# EAGLE board mysch (EAGLE 9.5.0)
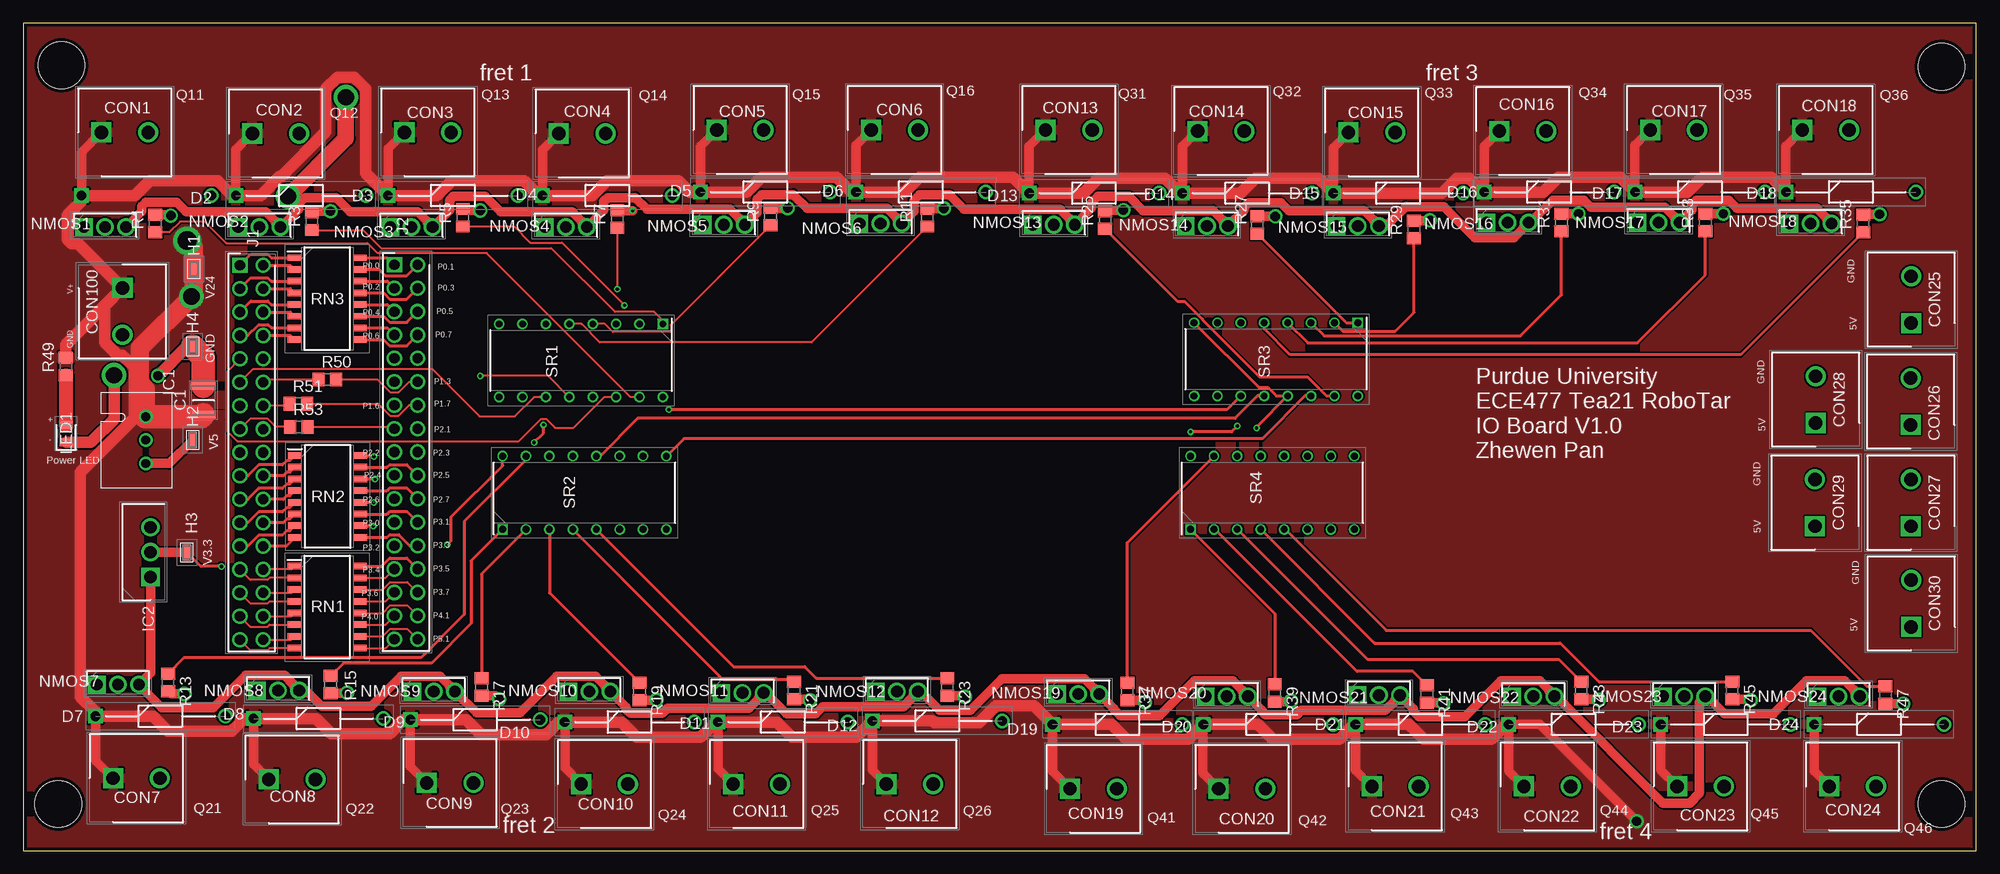
[diagram p0: board, top side]
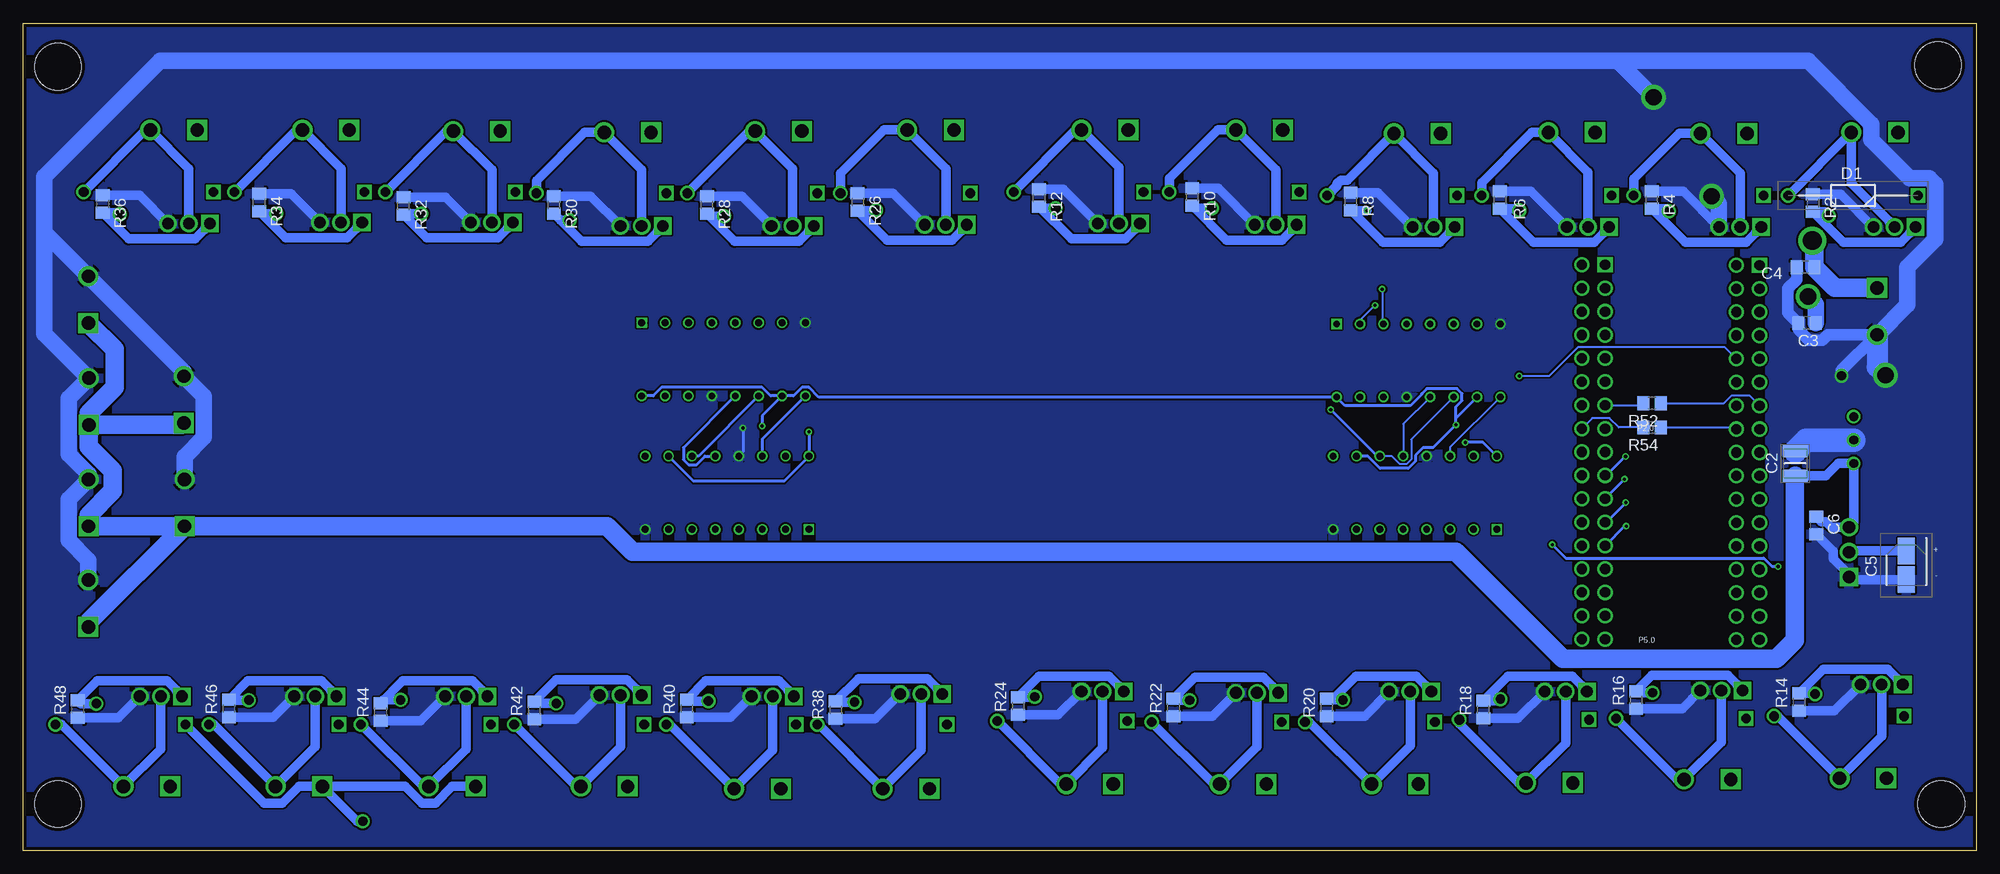
[diagram p1: board, bottom side, seen from below]

Size 212.07 x 89.84 mm. Coordinates in mm from the lower left corner, seen from the top.
Outline: 0,0 212.07,0 212.07,89.84 0,89.84 0,0
Copper layers (1*16): Top 0.0356mm / dielectric 1.5011mm / Bottom 0.0356mm
Design rules "ECE_Senior_Design": minimum track width 8mil, minimum drill 13mil, track to track 8mil, track to pad 8mil, pad to pad 6mil, via to via 8mil, smd to smd 6mil, copper to edge 15mil, drill to drill 8mil, minimum pad ring 7mil, minimum via ring 7mil, stop-mask expansion 3mil, vias tented up to drill 0mil, thermal gap 10mil
Holes 5.08 mm at 4.17,85.27 3.81,5.08 208.28,85.09 208.28,5.08

## Footprints (pad centres in the part's own frame; a part is rotated, then mirrored left to right if it is on the bottom)
CAPC3225X270N = smd 0.82 x 2.72: 1 -1.55,0; 2 1.55,0
CAPC3225X270N' = smd 1.26 x 2.72: 1 -1.33,0; 2 1.33,0
C0805 = smd 1.3 x 1.5: 1 -0.95,0; 2 0.95,0
CAPAE430X550N = smd 2.85 x 1.8: 1 -1.55,0; 2 1.55,0
SHDR2W90P0X508_1X2_1016X950X15 = drill 1.45 pad 2.175 square: 1 0,0 | drill 1.45 pad 2.175: 2 5.08,0
DIOAD1410W86L470D235 = drill 1.05 pad 1.575 square: 1 0,0 | drill 1.05 pad 1.575: 2 14.1,0
S276146R = smd 1.8 x 1: 1 0,0
OKI-78SR = drill 0.96 pad 1.46: 1 0,0; 2 2.54,0; 3 5.08,0
TO270P460X1020X2008-3P = drill 1.32 pad 1.98 square: 1 0,0 | drill 1.32 pad 1.98: 2 2.7,0; 3 5.4,0
HDRV34W90P254_2X17_4308X500X56 = drill 1.1 pad 1.65 square: 1 0,0 | drill 1.1 pad 1.65: 2 0,2.54; 3 2.54,0; 4 2.54,2.54; 5 5.08,0; 6 5.08,2.54; 7 7.62,0; 8 7.62,2.54; 9 10.16,0; 10 10.16,2.54; 11 12.7,0; 12 12.7,2.54; 13 15.24,0; 14 15.24,2.54; 15 17.78,0; 16 17.78,2.54; 17 20.32,0; 18 20.32,2.54; 19 22.86,0; 20 22.86,2.54; 21 25.4,0; 22 25.4,2.54; 23 27.94,0; 24 27.94,2.54; 25 30.48,0; 26 30.48,2.54; 27 33.02,0; 28 33.02,2.54; 29 35.56,0; 30 35.56,2.54; 31 38.1,0; 32 38.1,2.54; 33 40.64,0; 34 40.64,2.54
LEDC2012X90N = smd 0.9 x 1.4: 1 -0.95,0; 2 0.95,0
TO229P250X658X985-3P = drill 1.27 pad 1.905 square: 1 0,0 | drill 1.27 pad 1.905: 2 2.29,0; 3 4.58,0
R0805 = smd 1.3 x 1.5: 1 -0.95,0; 2 0.95,0
SOIC127P762X215-16N = smd 1.505 x 0.7: 1 -3.548,4.445; 2 -3.548,3.175; 3 -3.548,1.905; 4 -3.548,0.635; 5 -3.548,-0.635; 6 -3.548,-1.905; 7 -3.548,-3.175; 8 -3.548,-4.445; 9 3.548,-4.445; 10 3.548,-3.175; 11 3.548,-1.905; 12 3.548,-0.635; 13 3.548,0.635; 14 3.548,1.905; 15 3.548,3.175; 16 3.548,4.445
DIP794W53P254L1930H508Q16N = drill 0.73 pad 1.13 square: 1 -3.97,8.89 | drill 0.73 pad 1.13: 2 -3.97,6.35; 3 -3.97,3.81; 4 -3.97,1.27; 5 -3.97,-1.27; 6 -3.97,-3.81; 7 -3.97,-6.35; 8 -3.97,-8.89; 9 3.97,-8.89; 10 3.97,-6.35; 11 3.97,-3.81; 12 3.97,-1.27; 13 3.97,1.27; 14 3.97,3.81; 15 3.97,6.35; 16 3.97,8.89

## Placement (x,y rotation side)
C1  10u  [CAPC3225X270N]  19.58,48.89 270 top
C2  22u  [CAPC3225X270N']  19.68,42.04 270 bottom
C3  1u  [C0805]  18.41,57.28 180 bottom
C4  0.1u  [C0805]  18.57,63.32 180 bottom
C5  865080540004  [CAPAE430X550N]  7.62,30.99 270 bottom
C6  100n  [C0805]  17.4,35.31 270 bottom
CON1  1888687  [SHDR2W90P0X508_1X2_1016X950X15]  8.51,77.98 0 top
CON2  1888687  [SHDR2W90P0X508_1X2_1016X950X15]  24.89,77.85 0 top
CON3  1888687  [SHDR2W90P0X508_1X2_1016X950X15]  41.4,77.98 0 top
CON4  1888687  [SHDR2W90P0X508_1X2_1016X950X15]  58.17,77.85 0 top
CON5  1888687  [SHDR2W90P0X508_1X2_1016X950X15]  75.31,78.23 0 top
CON6  1888687  [SHDR2W90P0X508_1X2_1016X950X15]  92.08,78.23 0 top
CON7  1888687  [SHDR2W90P0X508_1X2_1016X950X15]  9.78,7.87 0 top
CON8  1888687  [SHDR2W90P0X508_1X2_1016X950X15]  26.67,7.75 0 top
CON9  1888687  [SHDR2W90P0X508_1X2_1016X950X15]  43.81,7.37 0 top
CON10  1888687  [SHDR2W90P0X508_1X2_1016X950X15]  60.58,7.24 0 top
CON11  1888687  [SHDR2W90P0X508_1X2_1016X950X15]  77.09,7.24 0 top
CON12  1888687  [SHDR2W90P0X508_1X2_1016X950X15]  93.73,7.24 0 top
CON13  1888687  [SHDR2W90P0X508_1X2_1016X950X15]  111,78.23 0 top
CON14  1888687  [SHDR2W90P0X508_1X2_1016X950X15]  127.51,78.11 0 top
CON15  1888687  [SHDR2W90P0X508_1X2_1016X950X15]  143.89,77.98 0 top
CON16  1888687  [SHDR2W90P0X508_1X2_1016X950X15]  160.27,78.11 0 top
CON17  1888687  [SHDR2W90P0X508_1X2_1016X950X15]  176.66,78.23 0 top
CON18  1888687  [SHDR2W90P0X508_1X2_1016X950X15]  193.17,78.23 0 top
CON19  1888687  [SHDR2W90P0X508_1X2_1016X950X15]  113.67,6.73 0 top
CON20  1888687  [SHDR2W90P0X508_1X2_1016X950X15]  129.79,6.73 0 top
CON21  1888687  [SHDR2W90P0X508_1X2_1016X950X15]  146.43,6.98 0 top
CON22  1888687  [SHDR2W90P0X508_1X2_1016X950X15]  162.94,6.98 0 top
CON23  1888687  [SHDR2W90P0X508_1X2_1016X950X15]  179.58,6.98 0 top
CON24  1888687  [SHDR2W90P0X508_1X2_1016X950X15]  196.09,6.98 0 top
CON25  1888687  [SHDR2W90P0X508_1X2_1016X950X15]  204.98,57.28 90 top
CON26  1888687  [SHDR2W90P0X508_1X2_1016X950X15]  204.93,46.23 90 top
CON27  1888687  [SHDR2W90P0X508_1X2_1016X950X15]  204.95,35.23 90 top
CON28  1888687  [SHDR2W90P0X508_1X2_1016X950X15]  194.61,46.43 90 top
CON29  1888687  [SHDR2W90P0X508_1X2_1016X950X15]  194.54,35.23 90 top
CON30  1888687  [SHDR2W90P0X508_1X2_1016X950X15]  204.98,24.31 90 top
CON100  1888687  [SHDR2W90P0X508_1X2_1016X950X15]  10.79,61.09 270 top
D1  1N4007  [DIOAD1410W86L470D235]  6.35,71.12 180 bottom
D2  1N4007  [DIOAD1410W86L470D235]  23.11,71.12 0 top
D3  1N4007  [DIOAD1410W86L470D235]  39.62,71.12 0 top
D4  1N4007  [DIOAD1410W86L470D235]  56.39,71.12 0 top
D5  1N4007  [DIOAD1410W86L470D235]  73.53,71.5 0 top
D6  1N4007  [DIOAD1410W86L470D235]  90.42,71.5 0 top
D7  1N4007  [DIOAD1410W86L470D235]  7.87,14.6 0 top
D8  1N4007  [DIOAD1410W86L470D235]  25.02,14.35 0 top
D9  1N4007  [DIOAD1410W86L470D235]  42.04,14.22 0 top
D10  1N4007  [DIOAD1410W86L470D235]  58.8,13.97 0 top
D11  1N4007  [DIOAD1410W86L470D235]  75.44,13.97 0 top
D12  1N4007  [DIOAD1410W86L470D235]  92.2,14.1 0 top
D13  1N4007  [DIOAD1410W86L470D235]  109.22,71.37 0 top
D14  1N4007  [DIOAD1410W86L470D235]  125.86,71.37 0 top
D15  1N4007  [DIOAD1410W86L470D235]  142.24,71.37 0 top
D16  1N4007  [DIOAD1410W86L470D235]  158.62,71.5 0 top
D17  1N4007  [DIOAD1410W86L470D235]  175.01,71.5 0 top
D18  1N4007  [DIOAD1410W86L470D235]  191.39,71.5 0 top
D19  1N4007  [DIOAD1410W86L470D235]  111.76,13.72 0 top
D20  1N4007  [DIOAD1410W86L470D235]  128.14,13.72 0 top
D21  1N4007  [DIOAD1410W86L470D235]  144.65,13.72 0 top
D22  1N4007  [DIOAD1410W86L470D235]  161.29,13.72 0 top
D23  1N4007  [DIOAD1410W86L470D235]  177.8,13.72 0 top
D24  1N4007  [DIOAD1410W86L470D235]  194.44,13.72 0 top
H1  S2761-46R  [S276146R]  18.54,63.14 270 top
H2  S2761-46R  [S276146R]  18.41,44.58 270 top
H3  S2761-46R  [S276146R]  17.78,32.38 270 top
H4  S2761-46R  [S276146R]  18.41,54.74 270 top
IC1  OKI-78SR-5_1.5-W36-C  [OKI-78SR]  13.34,47.12 270 top
IC2  LD1117AV33  [TO270P460X1020X2008-3P]  13.84,29.72 90 top
J1  90131-0937  [HDRV34W90P254_2X17_4308X500X56]  23.55,63.55 270 top
J2  90131-0937  [HDRV34W90P254_2X17_4308X500X56]  40.31,63.6 270 top
LED1  SML-H12U8TT86C  [LEDC2012X90N]  4.67,45.29 90 top
NMOS1  RFD3055LE  [TO229P250X658X985-3P]  6.6,67.69 0 top
NMOS2  RFD3055LE  [TO229P250X658X985-3P]  23.37,67.69 0 top
NMOS3  RFD3055LE  [TO229P250X658X985-3P]  39.88,67.69 0 top
NMOS4  RFD3055LE  [TO229P250X658X985-3P]  56.64,67.69 0 top
NMOS5  RFD3055LE  [TO229P250X658X985-3P]  73.79,67.94 0 top
NMOS6  RFD3055LE  [TO229P250X658X985-3P]  90.81,68.07 0 top
NMOS7  RFD3055LE  [TO229P250X658X985-3P]  8,18.03 0 top
NMOS8  RFD3055LE  [TO229P250X658X985-3P]  25.4,17.4 0 top
NMOS9  RFD3055LE  [TO229P250X658X985-3P]  42.29,17.27 0 top
NMOS10  RFD3055LE  [TO229P250X658X985-3P]  59.18,17.27 0 top
NMOS11  RFD3055LE  [TO229P250X658X985-3P]  75.82,17.14 0 top
NMOS12  RFD3055LE  [TO229P250X658X985-3P]  92.58,17.27 0 top
NMOS13  RFD3055LE  [TO229P250X658X985-3P]  109.6,67.94 0 top
NMOS14  RFD3055LE  [TO229P250X658X985-3P]  126.24,67.82 0 top
NMOS15  RFD3055LE  [TO229P250X658X985-3P]  142.62,67.82 0 top
NMOS16  RFD3055LE  [TO229P250X658X985-3P]  158.88,68.2 0 top
NMOS17  RFD3055LE  [TO229P250X658X985-3P]  175.26,68.2 0 top
NMOS18  RFD3055LE  [TO229P250X658X985-3P]  191.77,68.07 0 top
NMOS19  RFD3055LE  [TO229P250X658X985-3P]  112.27,17.02 0 top
NMOS20  RFD3055LE  [TO229P250X658X985-3P]  128.4,16.76 0 top
NMOS21  RFD3055LE  [TO229P250X658X985-3P]  144.91,16.89 0 top
NMOS22  RFD3055LE  [TO229P250X658X985-3P]  161.67,16.76 0 top
NMOS23  RFD3055LE  [TO229P250X658X985-3P]  178.05,16.76 0 top
NMOS24  RFD3055LE  [TO229P250X658X985-3P]  194.82,16.76 0 top
R1  1M  [R0805]  14.35,68.07 90 top
R2  3.3k  [R0805]  17.75,70.28 270 bottom
R3  1M  [R0805]  31.37,68.33 90 top
R4  3.3k  [R0805]  35.26,70.61 270 bottom
R5  1M  [R0805]  47.75,68.71 90 top
R6  3.3k  [R0805]  51.74,70.64 270 bottom
R7  1M  [R0805]  64.52,68.58 90 top
R8  3.3k  [R0805]  67.94,70.48 270 bottom
R9  1M  [R0805]  81.15,68.83 90 top
R10  3.3k  [R0805]  85.14,70.94 270 bottom
R11  1M  [R0805]  98.17,68.71 90 top
R12  3.3k  [R0805]  101.78,70.87 270 bottom
R13  1M  [R0805]  15.75,18.29 270 top
R14  3.3k  [R0805]  19.25,16.13 90 bottom
R15  1M  [R0805]  33.4,18.03 270 top
R16  3.3k  [R0805]  36.96,16.38 90 bottom
R17  1M  [R0805]  49.78,17.78 270 top
R18  3.3k  [R0805]  53.54,15.32 90 bottom
R19  1M  [R0805]  66.93,17.27 270 top
R20  3.3k  [R0805]  70.54,15.57 90 bottom
R21  1M  [R0805]  83.69,17.4 270 top
R22  3.3k  [R0805]  87.17,15.54 90 bottom
R23  1M  [R0805]  100.33,17.78 270 top
R24  3.3k  [R0805]  104.04,15.7 90 bottom
R25  1M  [R0805]  117.47,68.45 90 top
R26  3.3k  [R0805]  121.46,70.43 270 bottom
R27  1M  [R0805]  133.99,67.94 90 top
R28  3.3k  [R0805]  137.82,70.08 270 bottom
R29  1M  [R0805]  151,67.44 90 top
R30  3.3k  [R0805]  154.43,70.1 270 bottom
R31  1M  [R0805]  167,68.2 90 top
R32  3.3k  [R0805]  170.76,70 270 bottom
R33  1M  [R0805]  182.63,68.2 90 top
R34  3.3k  [R0805]  186.44,70.36 270 bottom
R35  1M  [R0805]  199.77,68.07 90 top
R36  3.3k  [R0805]  203.43,70.18 270 bottom
R37  1M  [R0805]  119.89,17.27 270 top
R38  3.3k  [R0805]  123.85,15.27 90 bottom
R39  1M  [R0805]  135.89,17.14 270 top
R40  3.3k  [R0805]  140,15.44 90 bottom
R41  1M  [R0805]  152.4,17.02 270 top
R42  3.3k  [R0805]  156.57,15.24 90 bottom
R43  1M  [R0805]  169.16,17.4 270 top
R44  3.3k  [R0805]  173.25,15.09 90 bottom
R45  1M  [R0805]  185.55,17.4 270 top
R46  3.3k  [R0805]  189.71,15.44 90 bottom
R47  1M  [R0805]  202.18,16.89 270 top
R48  3.3k  [R0805]  206.12,15.37 90 bottom
R49  1.1k  [R0805]  4.65,52.55 90 top
R50  100  [R0805]  33.02,51.16 0 top
R51  100  [R0805]  29.9,48.51 0 top
R52  100  [R0805]  35.23,48.56 180 bottom
R53  100  [R0805]  29.95,46 0 top
R54  100  [R0805]  35.23,45.95 180 bottom
RN1  4816P-T01-101LF  [SOIC127P762X215-16N]  33.02,26.44 0 top
RN2  4816P-T01-101LF  [SOIC127P762X215-16N]  33.07,38.46 0 top
RN3  4816P-T01-101LF  [SOIC127P762X215-16N]  33.02,59.92 0 top
SR1  SN74HC595N  [DIP794W53P254L1930H508Q16N]  60.58,53.21 270 top
SR2  SN74HC595N  [DIP794W53P254L1930H508Q16N]  60.96,38.86 90 top
SR3  SN74HC595N  [DIP794W53P254L1930H508Q16N]  136.02,53.34 270 top
SR4  SN74HC595N  [DIP794W53P254L1930H508Q16N]  135.64,38.86 90 top

## Library data of the parts
C1 = GRM32ER71H106KA12L; DESCRIPTION: Ceramic SMT capacitor 10uF 50Vdc Murata 1210 GRM 10uF Ceramic Multilayer Capacitor, 50 V dc, +125C, X7R Dielectric, +/-10%; HEIGHT: 2.7mm; MANUFACTURER_NAME: Murata Electronics; MANUFACTURER_PART_NUMBER: GRM32ER71H106KA12L; RS_PART_NUMBER: 7236824P; RS_PRICE-STOCK: http://uk.rs-online.com/web/p/products/7236824P
C2 = GRM32ER71E226ME15L; DESCRIPTION: Murata 1210 GRM 22uF Ceramic Multilayer Capacitor, 25 V dc, +125C, X7R Dielectric, +/-20% SMD; HEIGHT: 2.7mm; MANUFACTURER_NAME: Murata Electronics; MANUFACTURER_PART_NUMBER: GRM32ER71E226ME15L; RS_PART_NUMBER: 8467372P; RS_PRICE-STOCK: http://uk.rs-online.com/web/p/products/8467372P
C3 C4 C6 = rcl; SPICEPREFIX: C
C5 = 865080540004; DESCRIPTION: Wurth Elektronik 10uF 35 V dc Aluminium Electrolytic Capacitor, WCAP-ASLI Series 2000h 4 (Dia.) x 5.35mm; HEIGHT: 5.5mm; MANUFACTURER_NAME: Wurth Elektronik; MANUFACTURER_PART_NUMBER: 865080540004; RS_PART_NUMBER: 8392048P; RS_PRICE-STOCK: http://uk.rs-online.com/web/p/products/8392048P
CON1-CON30 CON100 = SamacSys_Parts; ALLIED_NUMBER: 70054422; DESCRIPTION: Phoenix Contact COMBICON MKDSN Series 5.08mm Pitch Straight PCB Terminal Block with Screw Termination, Through Hole; HEIGHT: 15mm; MANUFACTURER_NAME: Phoenix Contact; MANUFACTURER_PART_NUMBER: 1888687; RS_PART_NUMBER: 8045095; RS_PRICE-STOCK: http://uk.rs-online.com/web/p/products/8045095
D1-D24 = SamacSys_Parts; DESCRIPTION: MULTICOMP - 1N4007 - DIODE, STANDARD, 1A, 1000V,DO-41; HEIGHT: mm; MANUFACTURER_NAME: MULTICOMP; MANUFACTURER_PART_NUMBER: 1N4007
H1-H4 = S2761-46R; DESCRIPTION: Circuit Board Hardware - PCB SMT Mini Test Terminal, Reel; HEIGHT: 1.15mm; MANUFACTURER_NAME: HARWIN; MANUFACTURER_PART_NUMBER: S2761-46R
IC1 = SamacSys_Parts; DESCRIPTION: Non-Isolated DC/DC Converters 7.5W 24Vin 5Vout1 1.5A SIP Non-Iso; HEIGHT: mm; MANUFACTURER_NAME: Murata Electronics; MANUFACTURER_PART_NUMBER: OKI-78SR-5/1.5-W36-C; RS_PART_NUMBER: 7962132P; RS_PRICE-STOCK: http://uk.rs-online.com/web/p/products/7962132P
IC2 = LD1117AV33; ALLIED_NUMBER: 70407308; DESCRIPTION: LD1117AV33, Low Dropout Voltage Regulator, 1.2A, 3.3 V +/-2%, 3-Pin TO-220; HEIGHT: 4.6mm; MANUFACTURER_NAME: STMicroelectronics; MANUFACTURER_PART_NUMBER: LD1117AV33; RS_PART_NUMBER: 6869782P; RS_PRICE-STOCK: http://uk.rs-online.com/web/p/products/6869782P
J1 J2 = 90131-0937; ALLIED_NUMBER: 70373750; DESCRIPTION: Molex C-GRID III Series, Series Number 90131, 2.54mm Pitch 34 Way 2 Row Straight PCB Header, Solder Termination, 3A; HEIGHT: 5.6mm; MANUFACTURER_NAME: Molex; MANUFACTURER_PART_NUMBER: 90131-0937; RS_PART_NUMBER: 6703569; RS_PRICE-STOCK: http://uk.rs-online.com/web/p/products/6703569
LED1 = SML-H12U8TT86C; DESCRIPTION: ROHM - SML-H12U8TT86C - CHIP LED, AEC-Q101, RED, 40MCD, 0805; HEIGHT: 0.9mm; MANUFACTURER_NAME: ROHM Semiconductor; MANUFACTURER_PART_NUMBER: SML-H12U8TT86C
NMOS1-NMOS24 = SamacSys_Parts; DESCRIPTION: ON SEMICONDUCTOR - RFD3055LE - MOSFET, N-CH, 60V, 11A, TO-251AA-3; HEIGHT: 2.5mm; MANUFACTURER_NAME: ON Semiconductor; MANUFACTURER_PART_NUMBER: RFD3055LE
R1-R54 = rcl; SPICEPREFIX: R
RN1-RN3 = 4816P-T01-101LF; ALLIED_NUMBER: 70155540; DESCRIPTION: 8-isolated SMT resistor network,100R Bourns Isolated Resistor Array 100 +/-2% 8 Resistors, 1.28W Total, SOM package 4800P; HEIGHT: 2.15mm; MANUFACTURER_NAME: Bourns; MANUFACTURER_PART_NUMBER: 4816P-T01-101LF; RS_PART_NUMBER: 5224942P; RS_PRICE-STOCK: http://uk.rs-online.com/web/p/products/5224942P
SR1-SR4 = SamacSys_Parts; DESCRIPTION: 8-Bit Shift Registers With 3-State Output Registers; HEIGHT: 5.08mm; MANUFACTURER_NAME: Texas Instruments; MANUFACTURER_PART_NUMBER: SN74HC595N; RS_PART_NUMBER: 2175695P; RS_PRICE-STOCK: http://uk.rs-online.com/web/p/products/2175695P

## Nets
GND: C1.1 C2.1 C3.2 C4.2 C5.2 C6.2 CON25.2 CON26.2 CON27.2 CON28.2 CON29.2 CON30.2 CON100.2 H4.1 IC1.2 IC2.1 LED1.1 NMOS1.3 NMOS2.3 NMOS3.3 NMOS4.3 NMOS5.3 NMOS6.3 NMOS7.3 NMOS8.3 NMOS9.3 NMOS10.3 NMOS11.3 NMOS12.3 NMOS13.3 NMOS14.3 NMOS15.3 NMOS16.3 NMOS17.3 NMOS18.3 NMOS19.3 NMOS20.3 NMOS21.3 NMOS22.3 NMOS23.3 NMOS24.3 R2.1 R4.1 R6.1 R8.1 R10.1 R12.1 R14.1 R16.1 R18.1 R20.1 R22.1 R24.1 R26.1 R28.1 R30.1 R32.1 R34.1 R36.1 R38.1 R40.1 R42.1 R44.1 R46.1 R48.1 SR1.8 SR1.13 SR2.8 SR2.13 SR3.8 SR3.13 SR4.8 SR4.13
N$1: CON11.2 D11.2 NMOS11.2
N$2: NMOS11.1 R21.2 R22.2
N$3: CON12.2 D12.2 NMOS12.2
N$4: NMOS12.1 R23.2 R24.2
N$5: CON14.2 D14.2 NMOS14.2
N$6: NMOS1.1 R1.2 R2.2
N$7: CON1.2 D1.2 NMOS1.2
N$9: CON13.2 D13.2 NMOS13.2
N$10: NMOS14.1 R27.2 R28.2
N$11: CON15.2 D15.2 NMOS15.2
N$12: CON2.2 D2.2 NMOS2.2
N$13: NMOS2.1 R3.2 R4.2
N$14: NMOS15.1 R29.2 R30.2
N$15: CON3.2 D3.2 NMOS3.2
N$16: NMOS3.1 R5.2 R6.2
N$17: CON16.2 D16.2 NMOS16.2
N$18: CON4.2 D4.2 NMOS4.2
N$19: NMOS4.1 R7.2 R8.2
N$20: NMOS16.1 R31.2 R32.2
N$21: CON5.2 D5.2 NMOS5.2
N$22: NMOS5.1 R9.2 R10.2
N$23: CON17.2 D17.2 NMOS17.2
N$24: CON6.2 D6.2 NMOS6.2
N$25: NMOS6.1 R11.2 R12.2
N$26: NMOS17.1 R33.2 R34.2
N$27: CON7.2 D7.2 NMOS7.2
N$28: NMOS7.1 R13.2 R14.2
N$29: CON18.2 D18.2 NMOS18.2
N$30: CON8.2 D8.2 NMOS8.2
N$31: NMOS8.1 R15.2 R16.2
N$32: NMOS18.1 R35.2 R36.2
N$33: CON9.2 D9.2 NMOS9.2
N$34: NMOS9.1 R17.2 R18.2
N$35: CON19.2 D19.2 NMOS19.2
N$36: CON10.2 D10.2 NMOS10.2
N$37: NMOS10.1 R19.2 R20.2
N$38: NMOS19.1 R37.2 R38.2
N$39: CON20.2 D20.2 NMOS20.2
N$40: NMOS20.1 R39.2 R40.2
N$41: CON21.2 D21.2 NMOS21.2
N$42: NMOS21.1 R41.2 R42.2
N$43: CON22.2 D22.2 NMOS22.2
N$44: NMOS22.1 R43.2 R44.2
N$45: NMOS13.1 R25.2 R26.2
N$46: CON23.2 D23.2 NMOS23.2
N$47: NMOS23.1 R45.2 R46.2
N$48: CON24.2 D24.2 NMOS24.2
N$49: NMOS24.1 R47.2 R48.2
N$50: LED1.2 R49.1
OUT1: SR1.9 SR2.14
OUT2: SR2.9 SR3.14
OUT3: SR3.9 SR4.14
OUT4: SR4.9
P0.0: J1.1 RN3.1
P0.0_O: J2.1 RN3.16
P0.1: J1.2 RN3.2
P0.1_O: J2.2 RN3.15
P0.2: J1.3 RN3.3
P0.2_O: J2.3 RN3.14
P0.3: J1.4 RN3.4
P0.3_O: J2.4 RN3.13
P0.4: J1.5 RN3.5
P0.4_O: J2.5 RN3.12
P0.5: J1.6 RN3.6
P0.5_O: J2.6 RN3.11
P0.6: J1.7 RN3.7
P0.6_O: J2.7 RN3.10
P0.7: J1.8 RN3.8
P0.7_O: J2.8 RN3.9
P1.0: J1.9 SR1.14
P1.1: J1.10 SR1.12 SR2.12 SR3.12 SR4.12
P1.2: J1.11 SR1.11 SR2.11 SR3.11 SR4.11
P1.3: J1.12 R50.1
P1.3_O: J2.12 R50.2
P1.6: J1.13 R52.1
P1.6_O: J2.13 R52.2
P1.7: J1.14 R51.1
P1.7_O: J2.14 R51.2
P2.0: J1.15 R53.1
P2.0_O: J2.15 R53.2
P2.1: J1.16 R54.1
P2.1_O: J2.16 R54.2
P2.2: J1.17
P2.2_O: J2.17
P2.3: J1.18
P2.3_O: J2.18
P2.4: J1.19 RN2.1
P2.4_O: J2.19 RN2.16
P2.5: J1.20 RN2.2
P2.5_O: J2.20 RN2.15
P2.6: J1.21 RN2.3
P2.6_O: J2.21 RN2.14
P2.7: J1.22 RN2.4
P2.7_O: J2.22 RN2.13
P3.0: J1.23 RN2.5
P3.0_O: J2.23 RN2.12
P3.1: J1.24 RN2.6
P3.1_O: J2.24 RN2.11
P3.2: J1.25 RN2.7
P3.2_O: J2.25 RN2.10
P3.3: J1.26 RN2.8
P3.3_O: J2.26 RN2.9
P3.4: J1.27 RN1.2
P3.4_O: J2.27 RN1.15
P3.5: J1.28 RN1.1
P3.5_O: J2.28 RN1.16
P3.6: J1.29 RN1.4
P3.6_O: J2.29 RN1.13
P3.7: J1.30 RN1.3
P3.7_O: J2.30 RN1.14
P4.0: J1.31 RN1.6
P4.0_O: J2.31 RN1.11
P4.1: J1.32 RN1.5
P4.1_O: J2.32 RN1.12
P5.0: J1.33 RN1.8
P5.0_O: J2.33 RN1.9
P5.1: J1.34 RN1.7
P5.1_O: J2.34 RN1.10
Q11: R1.1 SR1.15
Q12: R3.1 SR1.1
Q13: R5.1 SR1.2
Q14: R7.1 SR1.3
Q15: R9.1 SR1.4
Q16: R11.1 SR1.5
Q21: R13.1 SR2.15
Q22: R15.1 SR2.1
Q23: R17.1 SR2.2
Q24: R19.1 SR2.3
Q25: R21.1 SR2.4
Q26: R23.1 SR2.5
Q31: R25.1 SR3.15
Q32: R27.1 SR3.1
Q33: R29.1 SR3.2
Q34: R31.1 SR3.3
Q35: R33.1 SR3.4
Q36: R35.1 SR3.5
Q41: R37.1 SR4.15
Q42: R39.1 SR4.1
Q43: R41.1 SR4.2
Q44: R43.1 SR4.3
Q45: R45.1 SR4.4
Q46: R47.1 SR4.5
V3.3: C5.1 H3.1 IC2.2 SR1.10 SR1.16 SR2.10 SR2.16 SR3.10 SR3.16 SR4.10 SR4.16
V5: C2.2 C6.1 CON25.1 CON26.1 CON27.1 CON28.1 CON29.1 CON30.1 H2.1 IC1.3 IC2.3
V24: C1.2 C3.1 C4.1 CON1.1 CON2.1 CON3.1 CON4.1 CON5.1 CON6.1 CON7.1 CON8.1 CON9.1 CON10.1 CON11.1 CON12.1 CON13.1 CON14.1 CON15.1 CON16.1 CON17.1 CON18.1 CON19.1 CON20.1 CON21.1 CON22.1 CON23.1 CON24.1 CON100.1 D1.1 D2.1 D3.1 D4.1 D5.1 D6.1 D7.1 D8.1 D9.1 D10.1 D11.1 D12.1 D13.1 D14.1 D15.1 D16.1 D17.1 D18.1 D19.1 D20.1 D21.1 D22.1 D23.1 D24.1 H1.1 IC1.1 R49.2

## Tracks (layer width: path | path; a pad name or v marks a point on that pad's centre or on a via)
GND  (via drill 0.35, 1, 1.78)
  Top 0.305: SR3.8 134.15,50.29 135.13,50.29 136.05,49.37 SR3.13 133.91,45.99 v133.91,45.9
  Top 1.016: NMOS24.3 198.77,17.39 198.77,17.45 197.8,18.43 193.57,18.43 190.03,14.88 184.71,14.88 182.83,16.76 NMOS23.3 182.01,16.14 182.01,6.23 180.96,5.19 178.02,5.19 166.44,16.76 NMOS22.3 165.62,17.39 165.62,17.45 164.65,18.43 160.42,18.43 156.53,14.53 151.53,14.53 150.94,15.12 150.94,15.44 NMOS21.3 148.86,16.27 148.86,16.2 147.89,15.23 138.72,15.23 138.28,14.78 134.9,14.78 134.43,15.25 134.43,15.31 NMOS20.3 132.35,17.39 132.35,17.45 131.38,18.43 127.15,18.43 123.38,14.66 119.15,14.66 118.43,15.38 118.43,15.44 NMOS19.3 116.22,17.64 116.22,17.71 115.25,18.68 106.29,18.68 102.84,15.24 99.51,15.24 97.48,17.27 NMOS12.3 96.54,16.65 96.54,16.58 95.56,15.61 86.78,15.61 86.03,14.86 82.88,14.86 80.59,17.14 NMOS11.3 79.77,16.52 79.77,16.46 78.8,15.48 69.97,15.48 69.39,14.91 65.94,14.91 65.47,15.38 65.47,15.57 NMOS10.3 63.14,17.9 63.14,17.96 62.16,18.94 57.94,18.94 53.98,14.99 49.22,14.99 46.94,17.27 NMOS9.3 46.24,17.9 46.24,17.96 45.27,18.94 41.04,18.94 37.78,15.67 32.41,15.67 30.68,17.4 NMOS8.3 29.35,18.03 29.35,18.09 28.38,19.06 24.15,19.06 20.64,15.54 15.07,15.54 NMOS7.3 13.84,19.3 IC2.1 | NMOS1.3 12.89,69.4 12.89,69.97 13.33,70.41 16.66,70.41 17.72,69.36 26.35,69.36 27.32,68.38 27.32,68.32 NMOS2.3 29.91,69.65 29.91,70.22 30.58,70.89 33.99,70.89 35.52,69.36 42.86,69.36 43.83,68.38 43.83,68.32 NMOS3.3 46.29,69.52 46.29,70.6 46.71,71.02 50.19,71.02 51.85,69.36 59.62,69.36 60.6,68.38 60.6,68.32 NMOS4.3 63.05,69.52 63.05,70.47 63.47,70.89 66.47,70.89 67.75,69.61 76.77,69.61 77.74,68.63 77.74,68.57 NMOS5.3 79.69,69.27 79.69,70.73 80.19,71.22 83.62,71.22 85.1,69.74 93.78,69.74 94.76,68.76 94.76,68.7 NMOS6.3 96.71,69.4 96.71,70.6 97.3,71.2 100.58,71.2 102.17,69.61 112.58,69.61 113.56,68.63 113.56,68.57 NMOS13.3 116.01,69.78 116.01,70.35 116.69,71.02 120.07,71.02 121.6,69.48 129.22,69.48 130.19,68.51 130.19,68.44 NMOS14.3 132.52,69.52 132.52,69.84 133.02,70.33 136.55,70.33 137.4,69.48 145.6,69.48 146.57,68.51 146.57,68.44 NMOS15.3 148.03,67.82 150.11,69.9 154.26,69.9 157.63,66.53 161.86,66.53 162.83,67.51 162.83,67.57 NMOS16.3 163.65,68.2 166.06,70.61 169.47,70.61 170.22,69.86 178.24,69.86 179.21,68.89 179.21,68.83 NMOS17.3 181.16,69.52 181.16,70.09 181.68,70.61 185.19,70.61 186.07,69.74 194.75,69.74 195.72,68.76 195.72,68.7 NMOS18.3
  Top 1.27: v14.66,51.56 17.83,54.74 H4.1 | LED1.1 7.36,44.34 9.88,46.86 v9.88,51.61
  Top 1.778: v28.78,71.04 35.05,77.32 v35.05,81.79
  Top 2.54: H4.1 19.58,53.57 C1.1
  Bottom 0.305: v133.91,45.9 133.91,43.29 SR4.13
  Bottom 1.016: NMOS7.3 15.44,15.18 R14.1 | NMOS8.3 31.95,15.43 R16.1 | NMOS9.3 49.78,14.37 R18.1 | NMOS10.3 66.41,14.62 R20.1 | NMOS11.3 82.95,14.6 R22.1 | NMOS12.3 99.69,14.75 R24.1 | NMOS19.3 119.55,14.31 R38.1 | NMOS20.3 135.25,14.49 R40.1 | NMOS21.3 152.09,14.29 R42.1 | NMOS22.3 168.88,14.14 R44.1 | NMOS23.3 184.91,14.49 R46.1 | NMOS24.3 201.75,14.42 R48.1 | C5.2 13.56,29.44 IC2.1 13.84,30.01 15.54,31.71 15.54,32.5 C6.2 | NMOS1.3 14.72,71.23 R2.1 | NMOS2.3 31.82,71.56 R4.1 | NMOS3.3 48.35,71.59 R6.1 | NMOS4.3 64.97,71.44 R8.1 | NMOS5.3 82.31,71.89 R10.1 | NMOS6.3 99.13,71.82 R12.1 | NMOS13.3 117.62,71.38 R26.1 | NMOS14.3 134.03,71.03 R28.1 | NMOS15.3 150.44,71.05 R30.1 | NMOS16.3 166.21,70.95 R32.1 | NMOS17.3 182.95,71.31 R34.1 | NMOS18.3 199.41,71.13 R36.1
  Bottom 1.27: v14.66,51.56 14.66,52.15 CON100.2 16.15,56.01 16.75,55.41 18.18,55.41 19.36,56.59 C3.2 20.46,58.37 20.46,61.05 19.52,61.99 C4.2
  Bottom 1.778: 209.75,67.13 209.75,73.15 197.18,85.72 38.99,85.72 | 209.75,67.13 CON25.2 194.62,51.99 CON28.2 192.44,49.33 192.44,44.89 194.54,42.79 CON29.2 | 38.99,85.72 18.25,85.72 11.41,78.88 11.41,77.16 7.25,73 5.11,73 4.47,72.36 4.47,66.38 7.5,63.35 7.5,59.24 10.73,56.01 CON100.2 | 209.75,67.13 209.75,56.13 CON26.2 207.11,49.13 207.11,43.04 204.95,40.89 CON27.2 207.13,38.13 207.13,33.69 204.98,31.54 CON30.2 | NMOS2.3 27.95,70.21 v28.78,71.04 | v35.05,81.79 38.99,85.72
  Bottom 2.286: CON100.2 10.79,52.53 v9.88,51.61
  Bottom 2.54: IC1.2 18.48,44.58 C2.1
  pour Bottom: -1.27,91.44 -1.27,-1.27 213.36,-1.27 213.36,91.44
N$1
  Bottom 1.016: NMOS11.2 78.11,11.3 CON11.2 82.81,7.24 D11.2
N$2  (via drill 1.02)
  Top 0.305: 85.3,16.45 v85.42,16.33
  Top 1.016: R21.2 85.3,16.45
  Bottom 0.305: 87.01,16.33 R22.2
  Bottom 1.016: v85.42,16.33 87.01,16.33 | NMOS11.1 76.44,17.77 76.44,17.83 77.42,18.81 84.86,18.81 R22.2
N$3
  Bottom 1.016: NMOS12.2 94.87,11.17 CON12.2 99.44,7.24 D12.2
N$4  (via drill 1.02)
  Top 0.305: 102.12,16.83 v102.23,16.71
  Top 1.016: R23.2 102.12,16.83
  Bottom 0.305: 104.05,16.64 R24.2
  Bottom 1.016: NMOS12.1 93.21,17.9 93.21,17.96 94.18,18.94 101.75,18.94 104.05,16.64 | R24.2 102.3,16.65 v102.23,16.71
N$5
  Bottom 1.016: NMOS14.2 128.53,74.05 CON14.2 133.23,78.11 D14.2
N$6  (via drill 1.02)
  Top 0.305: 15.97,69.02 v16.05,68.94
  Top 1.016: R1.2 15.97,69.02
  Bottom 1.016: NMOS1.1 7.23,67.06 7.23,67 8.21,66.03 14.45,66.03 R2.2 16.45,69.33 v16.05,68.94
N$7
  Bottom 1.016: NMOS1.2 9.52,68.32 9.52,68.38 13.59,72.45 CON1.2 D1.2
N$9
  Bottom 1.016: NMOS13.2 111.89,74.05 CON13.2 118.62,78.23 123.32,73.53 D13.2
N$10  (via drill 1.02)
  Top 1.016: R27.2 135.91,68.89 v135.94,68.86
  Bottom 1.016: v135.94,68.86 137.55,68.86 R28.2 134.85,66.15 127.84,66.15 126.86,67.13 126.86,67.19 NMOS14.1
N$11
  Bottom 1.016: NMOS15.2 144.91,73.92 CON15.2 151.09,77.98 156.34,72.73 D15.2
N$12
  Bottom 1.016: NMOS2.2 25.66,73.54 CON2.2 32.26,77.85 37.17,72.94 37.17,71.16 D2.2
N$13  (via drill 1.02)
  Top 0.305: 31.51,69.42 R3.2
  Top 1.016: v33.38,69.42 31.51,69.42
  Bottom 1.016: v33.38,69.42 33.62,69.66 R4.2 31.62,66.03 24.97,66.03 23.99,67 23.99,67.06 NMOS2.1
N$14  (via drill 1.02)
  Top 1.016: R29.2 152.72,68.39 v152.76,68.43
  Bottom 1.016: NMOS15.1 143.25,67.19 143.25,67.13 144.22,66.15 151.43,66.15 R30.2 153.71,68.43 v152.76,68.43
N$15
  Bottom 1.016: NMOS3.2 42.17,73.66 CON3.2 48.26,77.98 53.71,72.53 53.71,71.13 D3.2
N$16  (via drill 1.02)
  Top 0.305: 47.91,69.49 R5.2
  Top 1.016: v49.63,69.49 47.91,69.49
  Bottom 1.016: NMOS3.1 40.5,67.06 40.5,67 41.48,66.03 48.08,66.03 R6.2 49.83,69.69 v49.63,69.49
N$17
  Bottom 1.016: NMOS16.2 161.17,73.92 CON16.2 166.12,78.11 D16.2
N$18
  Bottom 1.016: NMOS4.2 58.93,73.54 CON4.2 68.3,72.8 68.99,72.8 69.41,72.38 69.41,72.2 D4.2
N$19  (via drill 0.35)
  Top 0.305: 64.58,69.47 R7.2
  Top 1.016: v66.17,69.47 64.58,69.47
  Bottom 0.305: R8.2 67.88,69.47
  Bottom 1.016: v66.17,69.47 67.88,69.47 64.44,66.03 58.24,66.03 57.27,67 57.27,67.06 NMOS4.1
N$20  (via drill 1.02)
  Top 0.305: 168.85,69.15 v168.86,69.14
  Top 1.016: R31.2 168.85,69.15
  Bottom 1.016: NMOS16.1 159.5,67.57 159.5,67.51 160.48,66.53 168.25,66.53 R32.2 170.68,69.14 v168.86,69.14
N$21
  Bottom 1.016: NMOS5.2 76.08,73.92 CON5.2 82.37,78.23 87.63,72.97 D5.2
N$22  (via drill 1.02)
  Top 0.305: 81.19,69.75 R9.2
  Top 1.016: v83.01,69.75 81.19,69.75
  Bottom 0.305: R10.2 84.9,69.75
  Bottom 1.016: 84.9,69.75 v83.01,69.75 | NMOS5.1 74.41,67.32 74.41,67.26 75.39,66.28 81.43,66.28 R10.2
N$23
  Bottom 1.016: NMOS17.2 177.55,74.05 CON17.2 182.38,78.23 D17.2
N$24
  Bottom 1.016: NMOS6.2 93.09,74.17 CON6.2 97.79,78.23 D6.2
N$25  (via drill 1.02)
  Top 0.305: v99.97,69.72 99.91,69.66
  Top 1.016: 99.91,69.66 R11.2
  Bottom 1.016: NMOS6.1 91.43,67.45 91.43,67.38 92.41,66.41 98.27,66.41 R12.2 101.58,69.72 v99.97,69.72
N$26  (via drill 1.02)
  Top 0.305: v184.57,69.15 v184.58,69.14
  Top 1.016: R33.2 v184.57,69.15
  Bottom 1.016: NMOS17.1 175.89,67.57 175.89,67.51 176.86,66.53 183.56,66.53 R34.2 186.17,69.14 v184.58,69.14
N$27
  Bottom 1.016: NMOS7.2 10.29,12.44 CON7.2 21.59,14.6 D7.2
N$28  (via drill 1.02)
  Top 0.305: 16.07,17.02 R13.2
  Top 1.016: v17.53,17.02 16.07,17.02
  Bottom 0.305: 17.59,17.08 v17.53,17.02
  Bottom 1.016: 17.59,17.08 R14.2 16.63,19.7 9.6,19.7 8.63,18.72 8.63,18.66 NMOS7.1
N$29
  Bottom 1.016: NMOS18.2 194.06,74.05 CON18.2 198.76,78.23 D18.2
N$30
  Bottom 1.016: NMOS8.2 27.69,11.81 CON8.2 32.52,7.75 D8.2
N$31  (via drill 1.02)
  Top 0.305: v35.18,17.14 35.12,17.08
  Top 1.016: 35.12,17.08 R15.2
  Bottom 0.305: R16.2 36.77,17.14
  Bottom 1.016: 36.77,17.14 v35.18,17.14 | NMOS8.1 26.03,18.03 26.03,18.09 27,19.06 35.23,19.06 R16.2
N$32  (via drill 1.02)
  Top 0.305: 199.84,69.09 R35.2
  Top 1.016: v201.55,69.09 199.84,69.09
  Bottom 1.016: NMOS18.1 192.4,67.45 192.4,67.38 193.37,66.41 200.61,66.41 R36.2 201.69,69.23 v201.55,69.09
N$33
  Bottom 1.016: NMOS9.2 44.58,11.68 CON9.2 49.71,7.37 56.14,13.79 D9.2
N$34  (via drill 1.02)
  Top 1.016: R17.2 51.32,16.83 v51.69,16.46
  Bottom 1.016: NMOS9.1 42.92,17.9 42.92,17.96 43.89,18.94 50.87,18.94 R18.2 51.88,16.27 v51.69,16.46
N$35
  Bottom 1.016: NMOS19.2 114.56,10.92 CON19.2 125.73,13.72 D19.2
N$36
  Bottom 1.016: NMOS10.2 61.47,11.43 CON10.2 72.39,13.97 D10.2
N$37  (via drill 1.02)
  Top 0.305: 68.72,16.32 v68.78,16.38
  Top 1.016: R19.2 68.72,16.32
  Bottom 0.305: 70.67,16.38 R20.2
  Bottom 1.016: v68.78,16.38 69.91,16.38 | 69.91,16.38 70.67,16.38 | NMOS10.1 59.81,17.9 59.81,17.96 60.78,18.94 67.36,18.94 69.91,16.38
N$38  (via drill 1.02)
  Top 0.305: 121.6,16.32 v121.79,16.13
  Top 1.016: R37.2 121.6,16.32
  Bottom 0.305: 123.76,16.13 R38.2
  Bottom 1.016: v121.79,16.13 123.76,16.13 | NMOS19.1 112.89,17.64 112.89,17.71 113.87,18.68 121.38,18.68 R38.2
N$39
  Bottom 1.016: NMOS20.2 130.69,10.92 CON20.2 141.86,13.72 D20.2
N$40  (via drill 1.02)
  Top 0.305: 137.61,16.2 v137.67,16.26
  Top 1.016: R39.2 137.61,16.2
  Bottom 0.305: 139.87,16.26 R40.2
  Bottom 1.016: v137.67,16.26 139.87,16.26 | NMOS20.1 129.02,17.39 129.02,17.45 130,18.43 137.97,18.43 R40.2
N$41
  Bottom 1.016: NMOS21.2 147.2,11.3 CON21.2 152.02,6.98 D21.2
N$42  (via drill 1.02)
  Top 0.305: 154.11,16.07 v154.18,16
  Top 1.016: R41.2 154.11,16.07
  Bottom 0.305: 156.38,16 R42.2
  Bottom 1.016: v154.18,16 156.38,16 | NMOS21.1 145.53,17.52 145.53,17.58 146.51,18.55 154.2,18.55 R42.2
N$43
  Bottom 1.016: NMOS22.2 163.96,11.04 CON22.2 168.66,6.98 D22.2
N$44  (via drill 1.02)
  Top 0.305: 171,16.45 v171.07,16.38
  Top 1.016: R43.2 171,16.45
  Bottom 0.305: 172.91,16.38 R44.2
  Bottom 1.016: v171.07,16.38 172.91,16.38 | NMOS22.1 162.3,17.39 162.3,17.45 163.27,18.43 170.86,18.43 R44.2
N$45  (via drill 1.02)
  Top 0.305: R25.2 117.62,69.55
  Top 1.016: 117.62,69.55 v119.46,69.55
  Bottom 0.305: v119.46,69.55 119.52,69.48
  Bottom 1.016: 119.52,69.48 R26.2 118.26,66.28 111.2,66.28 110.23,67.26 110.23,67.32 NMOS13.1
N$46
  Bottom 1.016: NMOS23.2 180.34,11.3 CON23.2 191.39,13.72 D23.2
N$47  (via drill 1.02)
  Top 0.305: 187.46,16.45 v187.55,16.36
  Top 1.016: R45.2 187.46,16.45
  Bottom 0.305: 189.68,16.36 R46.2
  Bottom 1.016: v187.55,16.36 189.68,16.36 | NMOS23.1 178.68,17.39 178.68,17.45 179.66,18.43 187.68,18.43 R46.2
N$48
  Bottom 1.016: NMOS24.2 197.11,11.04 CON24.2 207.9,13.72 D24.2
N$49  (via drill 1.02)
  Top 0.305: 204.08,15.94 v204.11,15.98
  Top 1.016: R47.2 204.08,15.94
  Bottom 0.305: 205.78,15.98 R48.2
  Bottom 1.016: v204.11,15.98 205.78,15.98 | NMOS24.1 195.44,17.39 195.44,17.45 196.42,18.43 204,18.43 R48.2
N$50
  Top 1.524: R49.1 4.65,46.26 LED1.2
OUT1
  Bottom 0.203: SR1.9 57.15,43.78 SR2.14
OUT2
  Top 0.305: SR3.14 139.19,49.37 134.56,44.74 71.75,44.74 SR2.9
OUT3
  Bottom 0.305: SR3.9 131.83,44.67 SR4.14
P0.0
  Top 0.305: RN3.1 26.94,64.36 26.57,64.73 24.73,64.73 J1.1
P0.0_O
  Top 0.305: RN3.16 39.55,64.36 J2.1
P0.1
  Top 0.305: J1.2 29.02,63.55 RN3.2
P0.1_O
  Top 0.305: RN3.15 38.66,63.09 39.34,62.42 41.67,62.42 J2.2
P0.2
  Top 0.305: RN3.3 26.94,61.82 26.57,62.19 24.73,62.19 J1.3
P0.2_O
  Top 0.305: RN3.14 39.55,61.82 J2.3
P0.3
  Top 0.305: J1.4 29.02,61.01 RN3.4
P0.3_O
  Top 0.305: RN3.13 39.15,60.55 39.82,59.88 41.67,59.88 J2.4
P0.4
  Top 0.305: RN3.5 26.94,59.28 26.57,59.65 24.73,59.65 J1.5
P0.4_O
  Top 0.305: RN3.12 39.55,59.28 J2.5
P0.5
  Top 0.305: J1.6 29.02,58.47 RN3.6
P0.5_O
  Top 0.305: RN3.11 39.15,58.01 39.82,57.34 41.67,57.34 J2.6
P0.6
  Top 0.305: J1.7 24.42,55.93 25.6,57.11 26.57,57.11 26.94,56.74 RN3.7
P0.6_O
  Top 0.305: RN3.10 39.55,56.74 J2.7
P0.7
  Top 0.305: J1.8 29.02,55.93 RN3.8
P0.7_O
  Top 0.305: RN3.9 39.15,55.47 39.82,54.8 41.67,54.8 J2.8
P1.0
  Top 0.203: J1.9 22.17,52.02 22.17,45.54 23.25,44.46 53.82,44.46 56.24,46.89 56.79,46.89 57.76,45.91 59.75,45.91 63.08,49.24 SR1.14
P1.1  (via drill 0.35)
  Top 0.203: SR1.12 57.02,51.54 v49.63,51.54
  Top 0.305: SR3.12 134.02,49.37 131.57,46.92 66.74,46.92 62.64,42.83 SR2.12
  Bottom 0.203: SR1.12 62.23,46.32 SR2.12 | v49.63,51.54 46.38,51.54 43.22,54.7 27.39,54.7 J1.10
  Bottom 0.305: SR4.12 138.03,42.83 138.95,41.91 139.83,41.91 140.37,42.45 140.37,43.75 SR3.12
P1.2  (via drill 0.35)
  Top 0.203: SR1.11 55.46,49.24 53.37,47.15 49.56,47.15 44.46,52.26 24.95,52.26 J1.11
  Top 0.305: SR3.11 130.72,47.88 v70.1,47.88
  Bottom 0.203: SR2.11 63.47,42.83 62.59,41.96 61.87,41.96 61.36,42.47 61.36,44.66 SR1.11
  Bottom 0.305: v70.1,47.88 65.06,42.83 SR2.11 | SR3.11 138.75,42.83 SR4.11
P1.3
  Top 0.203: J1.12 26.39,51.16 R50.1
P1.3_O
  Top 0.203: R50.2 38.46,51.16 39.84,49.77 40.78,49.77 41.91,50.9 J2.12
P1.6
  Bottom 0.203: R52.1 27.43,48.56 26.55,49.44 24.68,49.44 J1.13
P1.6_O
  Bottom 0.203: J2.13 36.38,48.36 R52.2
P1.7
  Top 0.203: R51.1 28.74,48.31 J1.14
P1.7_O
  Top 0.203: R51.2 35.87,48.51 36.35,48.51 38.56,48.51 39.84,47.23 40.78,47.23 41.91,48.36 J2.14
P2.0
  Top 0.203: R53.1 27.45,46 26.55,46.9 24.68,46.9 J1.15
P2.0_O
  Top 0.203: R53.2 40.13,46 J2.15
P2.1
  Bottom 0.203: R54.1 26.26,45.95 J1.16
P2.1_O
  Bottom 0.203: R54.2 38.84,45.95 39.84,46.95 41.72,46.95 J2.16
P2.4
  Top 0.305: RN2.1 28.96,42.34 28.62,42.34 28.16,41.87 25.6,41.87 24.42,40.69 J1.19
P2.4_O  (via drill 0.35)
  Top 0.305: RN2.16 38,42.9 v38.1,42.8
  Bottom 0.305: v38.1,42.8 40.16,40.74 J2.19
P2.5
  Top 0.305: RN2.2 28.96,41.07 28.62,41.07 28.25,40.69 J1.20
P2.5_O
  Top 0.305: RN2.15 39.53,41.63 39.82,41.92 41.67,41.92 J2.20
P2.6
  Top 0.305: RN2.3 28.96,39.8 28.62,39.8 28.16,39.33 25.6,39.33 24.42,38.15 J1.21
P2.6_O  (via drill 0.35)
  Top 0.305: RN2.14 38.2,40.36 v38.23,40.34
  Bottom 0.305: v38.23,40.34 40.31,38.25 J2.21
P2.7
  Top 0.305: RN2.4 28.96,38.53 28.62,38.53 28.25,38.15 J1.22
P2.7_O
  Top 0.305: RN2.13 39.53,39.09 39.82,39.38 41.67,39.38 J2.22
P3.0
  Top 0.305: RN2.5 28.96,37.26 28.62,37.26 28.16,36.79 25.6,36.79 24.42,35.61 J1.23
P3.0_O  (via drill 0.35)
  Top 0.305: RN2.12 38.05,37.82 v38.08,37.79
  Bottom 0.305: v38.08,37.79 40.21,35.66 J2.23
P3.1
  Top 0.305: RN2.6 28.96,35.99 28.62,35.99 28.25,35.61 J1.24
P3.1_O
  Top 0.305: RN2.11 39.53,36.55 39.82,36.84 41.67,36.84 J2.24
P3.2
  Top 0.305: RN2.7 28.96,34.72 28.62,34.72 28.16,34.25 25.6,34.25 24.42,33.07 J1.25
P3.2_O  (via drill 0.35)
  Top 0.305: RN2.10 37.97,35.28 v38.02,35.23
  Bottom 0.305: v38.02,35.23 38.2,35.23 J2.25
P3.3
  Top 0.305: RN2.8 28.58,33.07 J1.26
P3.3_O
  Top 0.305: J2.26 41.98,33.12 40.8,34.3 39.82,34.3 39.53,34.01 RN2.9
P3.4
  Top 0.203: RN1.2 26.77,29.62 26.55,29.4 24.68,29.4 J1.27
P3.4_O
  Top 0.203: RN1.15 39.34,29.62 J2.27
P3.5
  Top 0.203: RN1.1 29.12,30.53 J1.28
P3.5_O
  Top 0.305: RN1.16 38.95,30.89 39.82,31.76 41.67,31.76 J2.28
P3.6
  Top 0.203: RN1.4 26.77,27.08 26.55,26.86 24.68,26.86 J1.29
P3.6_O
  Top 0.203: RN1.13 39.34,27.08 J2.29
P3.7
  Top 0.203: J1.30 29.12,27.99 RN1.3
P3.7_O
  Top 0.203: RN1.14 39.02,28.35 39.84,29.17 41.72,29.17 J2.30
P4.0
  Top 0.203: RN1.6 26.77,24.54 26.55,24.32 24.68,24.32 J1.31
P4.0_O
  Top 0.203: RN1.11 39.34,24.54 J2.31
P4.1
  Top 0.203: J1.32 29.12,25.45 RN1.5
P4.1_O
  Top 0.203: RN1.12 39.02,25.81 39.84,26.63 41.72,26.63 J2.32
P5.0
  Top 0.203: RN1.8 26.77,22 26.55,21.78 24.68,21.78 J1.33
P5.0_O
  Top 0.203: RN1.9 39.34,22 J2.33
P5.1
  Top 0.203: J1.34 29.12,22.91 RN1.7
P5.1_O
  Top 0.203: RN1.10 39.02,23.27 39.84,24.09 41.72,24.09 J2.34
Q11
  Top 0.203: R1.1 15.88,67.12 17.04,68.29 19.74,68.29 22.07,65.96 37.39,65.96 38.5,64.86 50.35,64.86 65.96,49.24 SR1.15
Q12
  Top 0.203: SR1.1 69.47,57.51 68.5,58.48 64.25,58.48 57.31,65.42 38.86,65.42 36.91,67.38 R3.1
Q13  (via drill 0.35)
  Top 0.203: R5.1 53.3,67.76 55.05,66 58.51,66 v65.3,59.21
  Bottom 0.203: v65.3,59.21 66.93,57.58 SR1.2
Q14  (via drill 0.35)
  Top 0.203: R7.1 v64.52,60.96
  Bottom 0.203: v64.52,60.96 64.52,57.31 SR1.3
Q15
  Top 0.203: SR1.4 63.15,57.18 64.03,56.31 70.19,56.31 70.34,56.46 70.34,57.07 R9.1
Q16
  Top 0.203: SR1.5 60.61,57.18 62.6,55.19 85.61,55.19 R11.1
Q21
  Top 0.305: SR2.15 54.61,42.45 47.9,35.74 47.9,25.66 43.2,20.96 17.46,20.96 R13.1
Q22
  Top 0.305: SR2.1 48.64,31.46 48.64,24.68 44.34,20.38 34.8,20.38 R15.1
Q23
  Top 0.305: SR2.2 49.78,30.07 R17.1
Q24
  Top 0.305: SR2.3 57.15,28 R19.1
Q25
  Top 0.305: SR2.4 76,18.58 83.46,18.58 R21.1
Q26
  Top 0.305: R23.1 86.1,18.73 84.84,19.99 77.13,19.99 SR2.5
Q31
  Top 0.305: R25.1 125.35,59.63 126.11,59.63 128.05,57.69 128.05,57.63 134.24,51.43 139.45,51.43 141.51,49.37 SR3.15
Q32
  Top 0.305: R27.1 143.67,57.31 SR3.1
Q33
  Top 0.305: SR3.2 143.29,56.39 148.97,56.39 151,58.42 R29.1
Q34
  Top 0.305: SR3.3 141.26,55.88 162.56,55.88 167,60.33 R31.1
Q35
  Top 0.305: SR3.4 139.48,55.12 175.26,55.12 182.63,62.48 R33.1
Q36
  Top 0.305: R35.1 186.5,53.85 137.54,53.85 134.75,56.64 SR3.5
Q41
  Top 0.305: R37.1 119.89,33.43 SR4.15
Q42
  Top 0.305: SR4.1 135.89,25.75 R39.1
Q43
  Top 0.305: SR4.2 129.41,34.89 144.84,19.47 150.9,19.47 R41.1
Q44
  Top 0.305: R43.1 166.75,20.76 145.96,20.76 SR4.3
Q45
  Top 0.305: SR4.4 146.73,22.53 166.89,22.53 171.07,18.35 R45.1
Q46
  Top 0.305: SR4.5 137.03,34.89 148,23.93 194.09,23.93 200.17,17.84 R47.1
V3.3  (via drill 0.35)
  Top 0.305: v55.5,44.32 56.52,45.34 v56.52,46.23 | v131.83,46.1 131.19,45.47 v126.75,45.47 | SR2.16 52.07,41.81 46.43,36.17 46.43,33.81 46.43,33.6 v46.05,33.22 | v21.54,30.86 19.3,30.86 17.75,32.42
  Top 0.406: 17.75,32.42 H3.1
  Top 1.016: IC2.2 17.75,32.42
  Bottom 0.305: SR2.16 53.56,44.32 v55.5,44.32 | v56.52,46.23 56.52,46.96 SR1.10 | v56.52,46.23 56.52,48.2 55.85,48.86 55.85,49.62 56.39,50.16 59.69,50.16 60.23,49.62 60.23,49.56 61.47,48.32 68.55,48.32 SR1.16 125.7,49.24 126.75,50.29 127.51,50.29 128.43,49.37 SR3.10 | v56.52,46.23 58.99,43.75 60.07,43.75 60.9,42.92 60.9,42.28 61.68,41.5 64.74,41.5 66.07,42.83 SR2.10 | SR3.10 130.91,49.37 131.83,50.29 142.75,50.29 143.67,49.37 SR3.16 | SR3.10 131.83,47.21 v131.83,46.1 | v126.75,45.47 SR4.16 129.45,40.13 139.29,40.13 SR4.10 | v46.05,33.22 44.59,31.76 23.11,31.76 22.21,30.86 v21.54,30.86
  Bottom 1.016: C5.1 13.72,32.54 IC2.2
V5
  Top 1.016: H2.1 15.88,42.04 IC1.3
  Bottom 1.016: C6.1 16.86,35.72 16.35,35.72 15.76,35.12 IC2.3 13.34,35.63 IC1.3 15.01,42.04 16.34,40.71 C2.2 | 204.98,24.79 CON30.1 | 194.82,46.23 CON28.1
  Bottom 2.032: CON29.1 148.65,35.23 145.89,32.47 56.52,32.47 44.91,20.87 21.74,20.87 19.75,22.86 19.75,40.64 C2.2 | CON29.1 204.98,24.79 | CON29.1 CON27.1 204.95,36.42 202.32,39.06 202.32,41.23 204.93,43.84 CON26.1 | CON26.1 194.82,46.23 | CON26.1 204.93,47.47 202.11,50.28 202.11,54.41 CON25.1
V24  (via drill 1.02, 1.78, 2.03)
  Top 1.016: D7.1 7.87,9.78 CON7.1 | D8.1 25.02,9.4 CON8.1 | D9.1 42.01,14.2 42.01,9.17 CON9.1 | D10.1 58.83,13.94 58.83,8.99 CON10.1 | D11.1 75.44,8.89 CON11.1 | D12.1 92.2,8.76 CON12.1 | D19.1 111.76,8.64 CON19.1 | CON20.1 128.12,8.41 128.12,13.69 D20.1 | D21.1 144.65,8.76 CON21.1 | CON22.1 161.29,8.64 D22.1 164.67,13.72 v175.18,3.2 | D23.1 177.8,8.76 CON23.1 | D24.1 194.44,8.64 CON24.1 | D1.1 6.35,75.82 CON1.1 | CON2.1 23.11,76.07 D2.1 | CON3.1 39.62,76.2 D3.1 | CON4.1 56.39,76.07 D4.1 | CON5.1 73.53,76.45 D5.1 | CON6.1 90.42,76.58 D6.1 | CON13.1 109.22,76.45 D13.1 | CON14.1 125.86,76.45 D14.1 | CON15.1 142.24,76.33 D15.1 | CON16.1 158.62,76.45 D16.1 | CON17.1 175.01,76.58 D17.1 | CON18.1 191.39,76.45 D18.1
  Top 1.27: R49.2 4.65,54.94 CON100.1 | CON100.1 5.98,65.9 5.3,65.9 4.81,66.39 4.81,68.99 6.35,70.53 D1.1 12.14,71.12 13.77,72.75 21.12,72.75 22.75,71.12 D2.1 25.78,71.12 27.88,73.22 28.06,73.22 32.88,78.04 32.88,82.69 34.15,83.96 35.95,83.96 37.22,82.69 37.22,73.52 D3.1 44.91,71.12 46.53,72.75 54.4,72.75 56.02,71.12 D4.1 61.8,71.12 63.42,72.75 71.16,72.75 72.41,71.5 D5.1 78.56,71.5 80.19,73.13 88.31,73.13 89.93,71.5 D6.1 95.7,71.5 97.33,73.13 107.47,73.13 D13.1 115.14,71.37 116.76,73 123.99,73 125.62,71.37 D14.1 132.15,71.37 133.78,73 140.63,73 141.58,72.05 141.58,72.03 D15.1 154.04,71.37 155.67,73 157.01,73 158.51,71.5 D16.1 165.05,71.5 166.67,73.13 173.4,73.13 174.35,72.17 174.35,72.16 D17.1 180.67,71.5 182.29,73.13 189.78,73.13 190.73,72.17 190.73,72.16 D18.1 | CON100.1 8.87,59.16 8.87,55.21 10.29,53.78 10.78,53.78 12.05,52.51 12.05,46.95 6.21,41.11 6.21,16.73 7.87,15.07 D7.1 14.11,14.6 15.73,12.98 22.65,12.98 24.02,14.35 D8.1 31.82,14.35 33.45,12.72 39.79,12.72 41.27,14.2 42.01,14.2 | D9.1 48.08,14.22 49.71,12.6 56.81,12.6 58.16,13.94 58.83,13.94 | D10.1 64.97,13.97 66.6,12.34 73.57,12.34 75.2,13.97 D11.1 81.86,13.97 83.49,12.34 90.45,12.34 D12.1 98.75,14.1 98.96,13.89 103.8,13.89 105.63,15.72 109.75,15.72 D19.1 118.18,13.72 119.81,12.09 126.53,12.09 127.49,13.04 127.49,13.06 128.12,13.69 | D20.1 134.06,13.72 135.69,12.09 142.92,12.09 144.54,13.72 D21.1 150.44,13.72 152.07,12.09 159.43,12.09 161.05,13.72 D22.1
  Top 2.032: v17.82,66.23 18.54,65.51 H1.1 18.54,60.4 v18.29,60.15 12.69,54.55 12.69,50.75 13.34,50.1 IC1.1
  Top 2.54: IC1.1 19.36,47.12 C1.2
  Bottom 1.016: CON22.1 165.48,6.98 167.28,5.19 168.77,5.19 170.56,6.98 CON23.1 | v175.18,3.2 175.79,3.2 CON23.1 | CON23.1 182.11,6.98 183.91,5.19 185.91,5.19 D24.1
  Bottom 1.778: v18.29,60.15 17.46,59.32 C3.1
  Bottom 2.032: CON100.1 15.38,61.09 C4.1 17.62,66.03 v17.82,66.23
  pour Top: -1.27,91.44 -1.27,-1.27 213.36,-1.27 213.36,91.44

## Text on the board
tPlace: fret 1 | fret 3 | Q16 | Q32 | Q33 | Q34 | Q11 | Q13 | Q14 | Q15 | Q31 | Q35 | Q36 | Q12 | P0.0 | P0.1 | V24 | V+ | P0.2 | P0.3 | GND | P0.4 | P0.5 | GND | GND | P0.7 | 5V | P0.6 | P1.3 | GND | P1.6 | P1.7 | + | V5 | P2.1 | 5V | - | P2.2 | P2.3 | Power LED | Purdue University / ECE477 Tea21 RoboTar / IO Board V1.0 / Zhewen Pan | P2.4 | P2.5 | GND | P2.6 | P2.7 | P3.0 | P3.1 | V3.3 | 5V | P3.3 | P3.2 | P3.4 | P3.5 | GND | P3.7 | P3.6 | P4.0 | P4.1 | 5V | P5.1 | Q21 | Q22 | Q23 | Q25 | Q26 | Q44 | Q24 | Q41 | Q42 | Q43 | Q45 | fret 2 | Q46 | fret 4
bPlace: P2.0 | + | - | P5.0